# Altium PCB Sensor_Test.PcbDoc
Units mil, origin at the board's own origin, x right, y up, seen from the top; angles counter-clockwise.
Board outline 1500 x 1500 mil, 2 copper layers (Top Layer, Bottom Layer); 19 components, 60 nets, 97 pads, 28 vias.
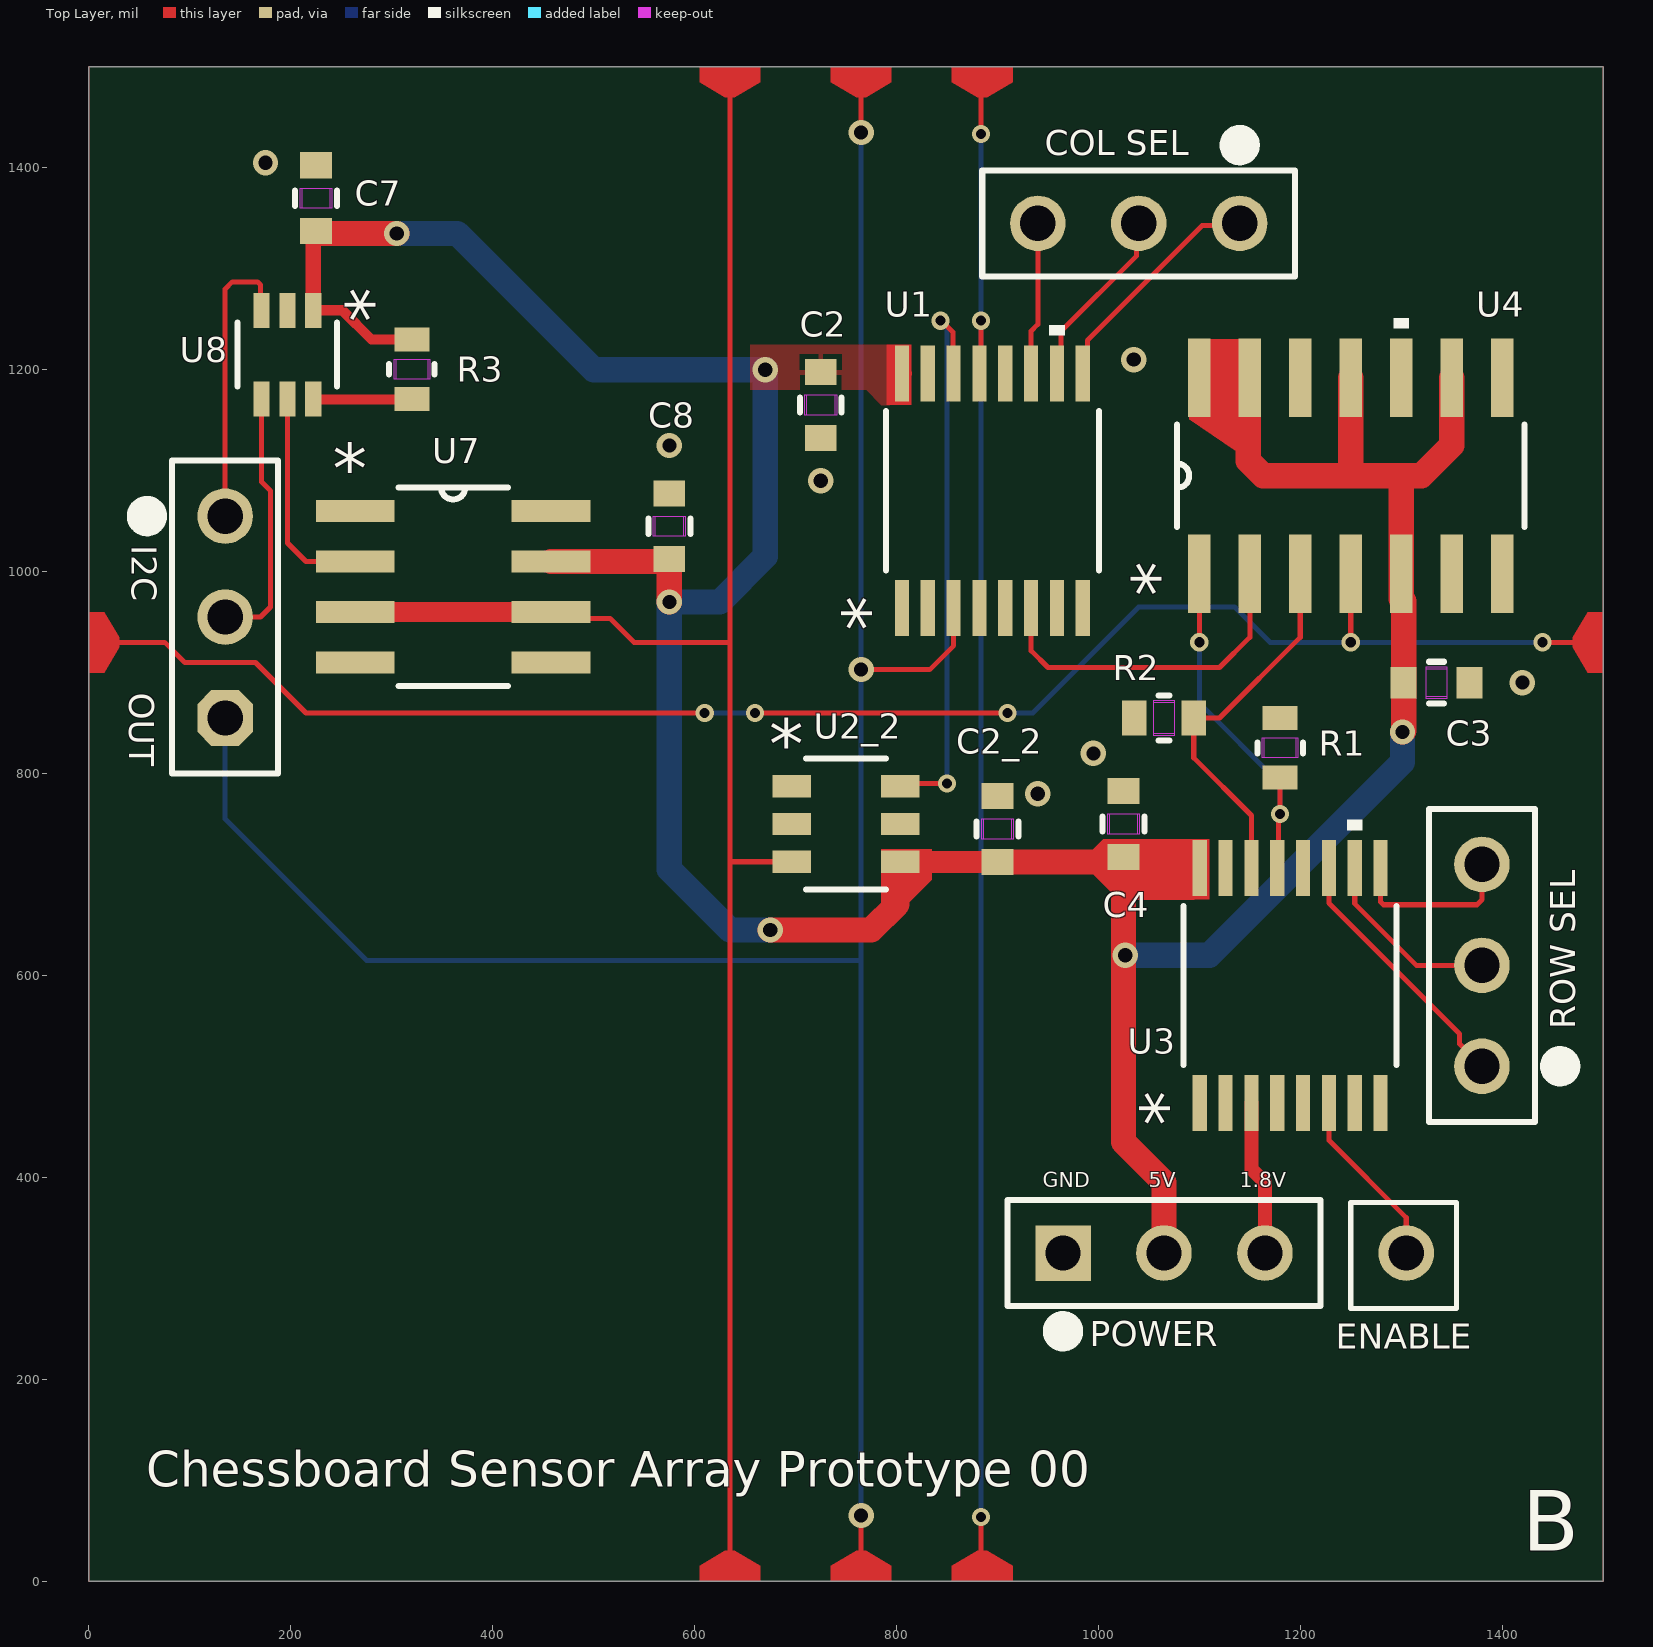
[diagram p0: Top Layer view]
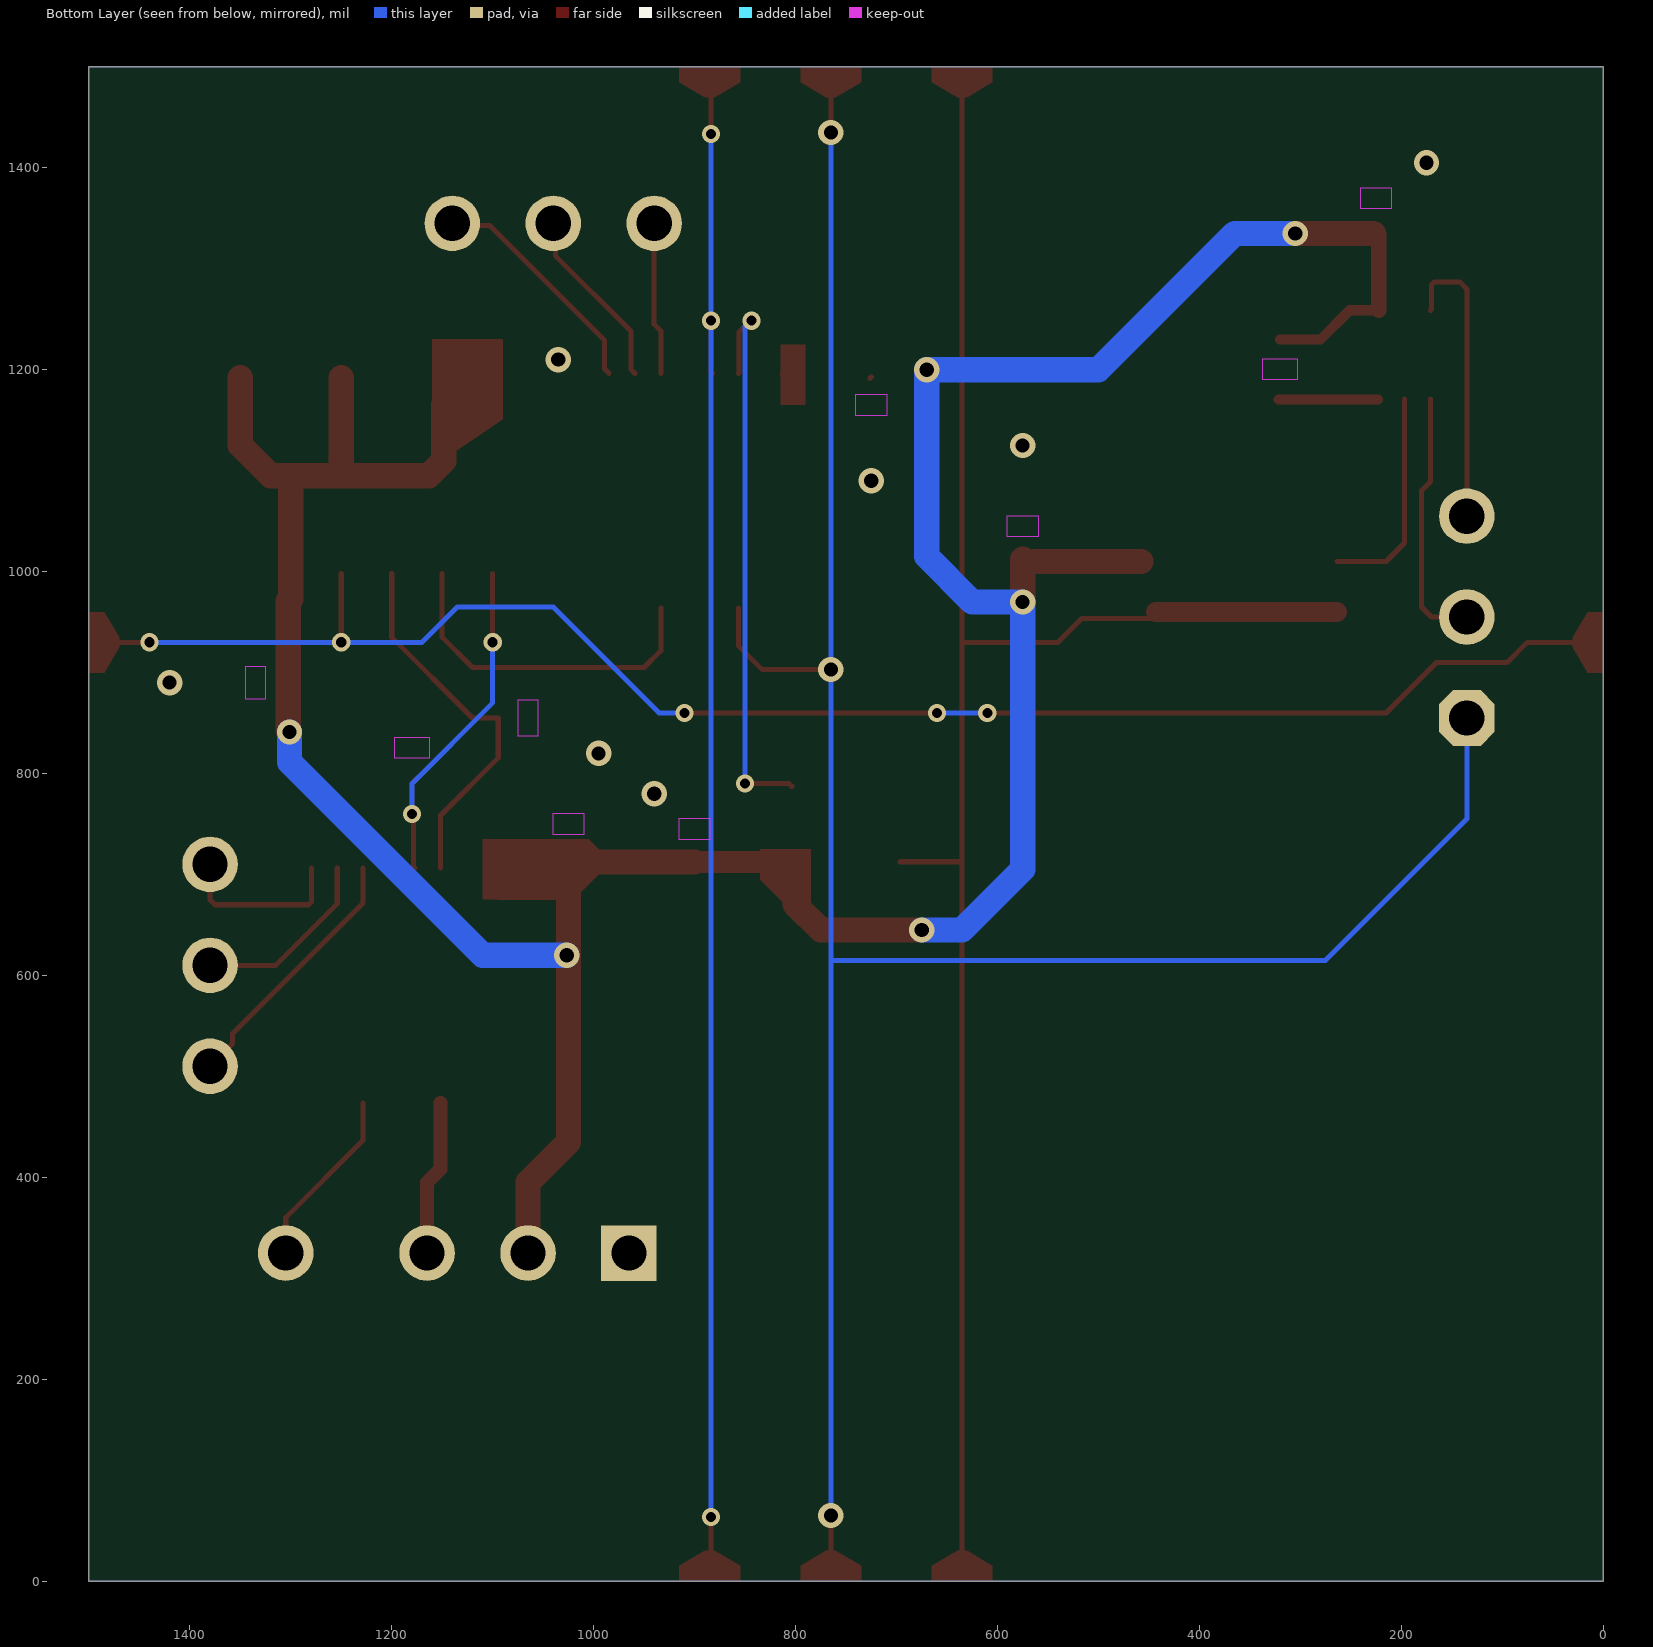
[diagram p1: Bottom Layer view, seen from below]
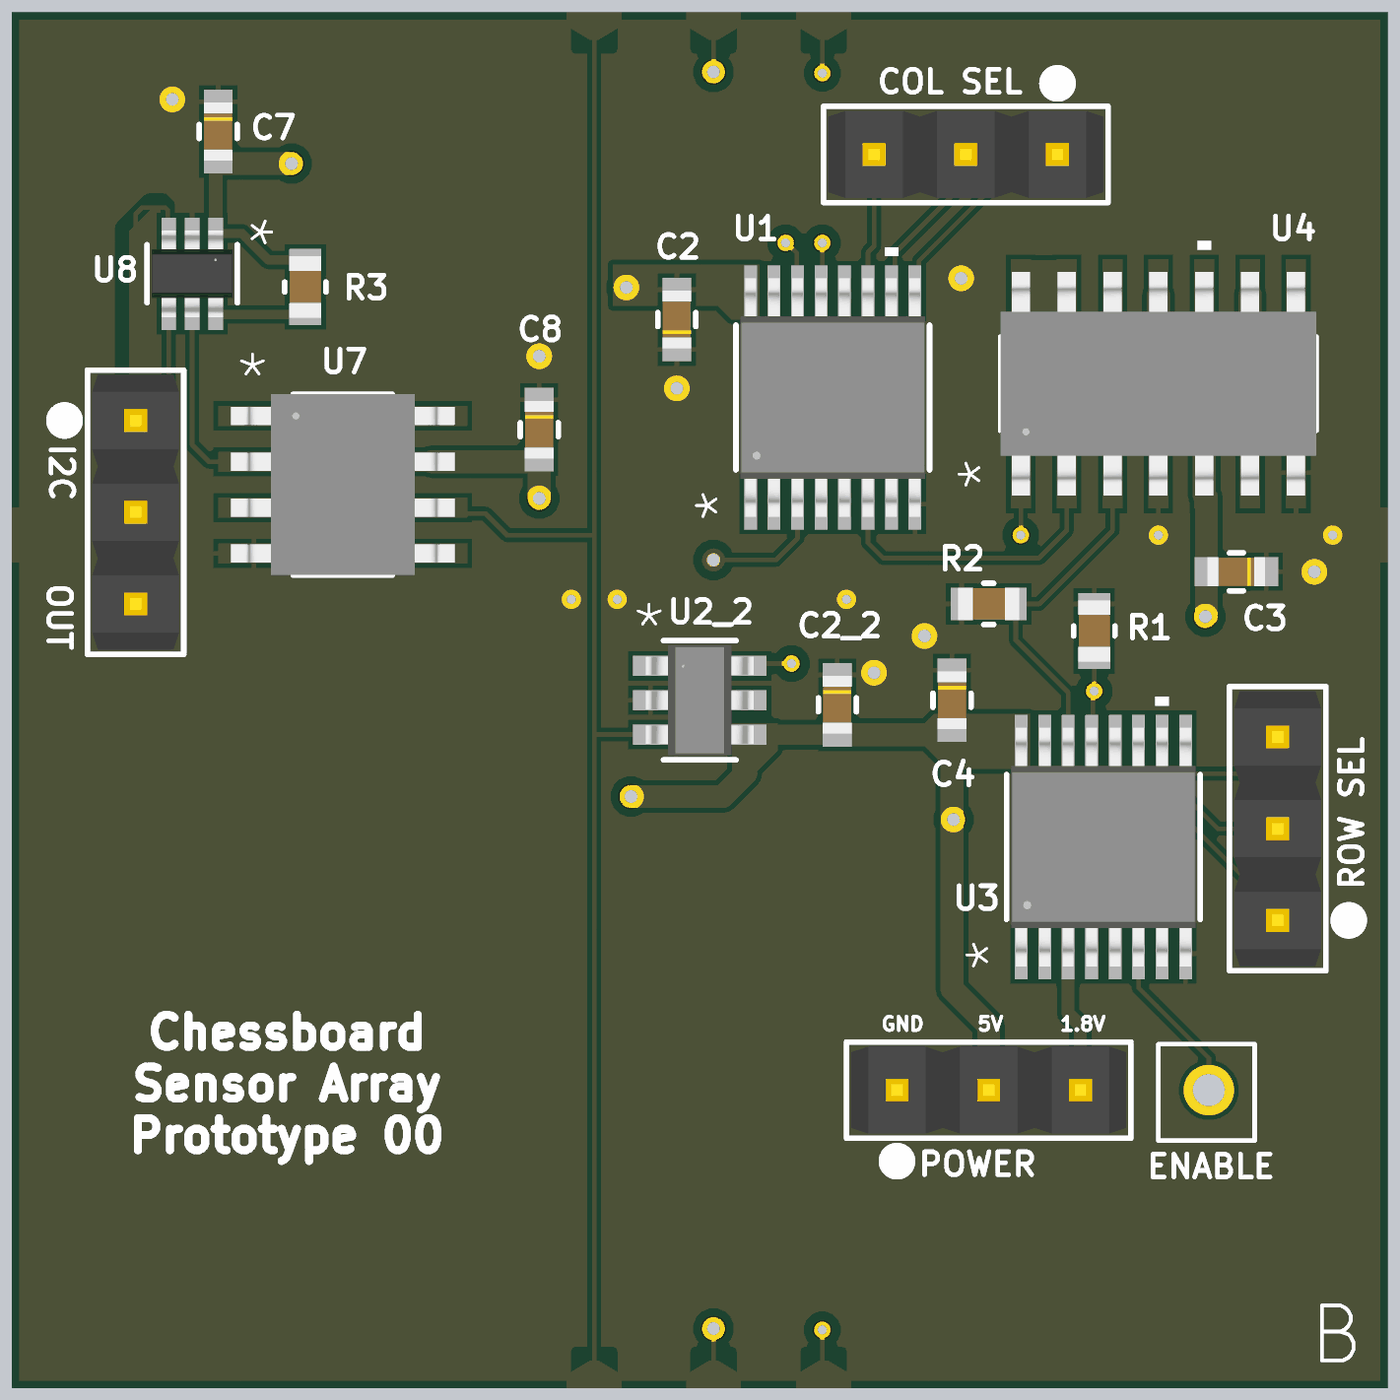
[diagram p2: 3D render of the assembled board from above, using the file's embedded part models]

## Layer stack, top to bottom
Top Solder: solder mask 0.4, Solder Resist, Dk 3.5
Top Layer: signal copper 1.4
Dielectric 1: dielectric 12.6, FR-4, Dk 4.8
Bottom Layer: signal copper 1.4
Bottom Solder: solder mask 0.4, Solder Resist, Dk 3.5

## Board outline
0,0 1500,0 1500,1500 0,1500

## Design rules (kind name [scope] priority, off if disabled: settings)
BoardOutlineClearance [All] p1: gap=7.87 ignorepadtopadclearanceinfootprint=FALSE
Clearance [All] p1: gap=5 ignorepadtopadclearanceinfootprint=TRUE except(7.87: Arc-SMDPad Track-SMDPad; 10: Arc-Via Track-Via Via-Via; 12.99: Arc-THPad Track-THPad; 15: Arc-Hole Track-Hole SMDPad-Hole THPad-Hole Via-Hole Fill-Hole Poly-Hole Region-Hole Text-Hole)
DiffPairsRouting [All] p1: maxlimit=10 minlimit=5 mostfreqgap=5 toplayer_minwidth=5 toplayer_maxwidth=1000 toplayer_prefwidth=5 bottomlayer_minwidth=5 bottomlayer_maxwidth=1000 bottomlayer_prefwidth=5 maxuncoupledlength=500
HoleSize [All] p1: absolutevalues=TRUE maxlimit=248.03 minlimit=5.91 maxpercent=80.000 minpercent=20.000
HoleToHoleClearance [All] p1: gap=9.84 allowstackedmicrovias=FALSE
MinimumAnnularRing [All] p1: minimumring=3
MinimumSolderMaskSliver [All] p1: minsoldermaskwidth=0
PlaneClearance [All] p1: clearance=5
PlaneConnect PlaneConnectPowerPads [InPadClass('PowerPads')] p1: planeconnectstyle=Direct reliefexpansion=20 reliefentries=4 reliefconductorwidth=10 reliefairgap=10
PlaneConnect [All] p2: pad.planeconnectstyle=Relief pad.reliefexpansion=11.81 pad.reliefentries=4 pad.reliefconductorwidth=5 pad.reliefairgap=5 via.planeconnectstyle=Direct via.reliefexpansion=11.81 via.reliefentries=4 via.reliefconductorwidth=5 via.reliefairgap=5
PolygonConnect PolygonConnectPowerPads [All vs (InPadClass('PowerPads'))] p1: connectstyle=Direct reliefconductorwidth=10 reliefentries=4 polygonreliefangle="90 Angle" airgapwidth=10
PolygonConnect [All] p2: thpad.connectstyle=Relief thpad.reliefconductorwidth=10 thpad.reliefentries=4 thpad.polygonreliefangle="90 Angle" thpad.airgapwidth=5 smdpad.connectstyle=Relief smdpad.reliefconductorwidth=5 smdpad.reliefentries=4 smdpad.polygonreliefangle="90 Angle" smdpad.airgapwidth=5 via.connectstyle=Direct via.reliefconductorwidth=5 via.reliefentries=4 via.polygonreliefangle="90 Angle" via.airgapwidth=5
RoomDefinition U_Hall_Latch1 [InComponentClass('U_Hall_Latch1')] p1: confinementstyle=ConfineIn formatcopy=TRUE lockcomponents=FALSE outline 980,670 655,670 655,865 980,865
RoutingVias [All] p1: holewidth=11.81 width=19.68 viastyle="Through Hole" minholewidth=5.91 minwidth=9.84 maxholewidth=50 maxwidth=50
SilkToSilkClearance [All] p1: silktosilkclearance=0
SilkToSolderMaskClearance [IsPad] p1: minsilkscreentomaskgap=5 clearancetoexposedcopper=TRUE
SolderMaskExpansion [All] p1: expansion=1.5 istentingtop=FALSE
Width [All] p1: maxlimit=1000 minlimit=5 preferedwidth=5 minimp=50.000000 maximp=50.000000 favimp=50.000000
22 further rules are at their usual default settings.

## Classes and differential pairs
net class OUT[0..3]: OUT0 OUT1 OUT2 OUT3
component class U_Hall_Latch0: x
channel class Hall_Latch: U_Hall_Latch0 U_Hall_Latch1 U_Hall_Latch2 U_Hall_Latch3
component class U_Hall_Latch1: C2_2 U2_2
component class TOP: C2 C3 C4 C7 C8 R1 R2 R3 U1 U3 U4 U7 U8

## Components (designator, comment, footprint, x,y, rotation, side; value= is the part's Value field where it differs from the comment)
C2 "1μF" CAP_CL10_SAM 725,1165 r90 top
C2_2 "1μF" CAP_CL10_SAM 900,745 r270 top (schematic designator C2)
C3 "1μF" CAP_CL10_SAM 1335,890 r180 top
C4 "1μF" CAP_CL10_SAM 1025,750 r270 top
C7 "1μF" CAP_CL10_SAM 225,1370 r270 top
C8 "1μF" CAP_CL10_SAM 575,1045 r270 top
"COL SEL" "Comment" CONN_10129378-903004BLF_AMP#1 1140,1345 r180 top
I2C "Comment" CONN_10129378-903004BLF_AMP#2 135,1055 r270 top
POWER "Comment" CONN_10129378-903004BLF_AMP#3 965,325 r0 top
R1 "10kΩ" RES_RC0603_YAG 1180,825.5 r90 top
R2 "10kΩ" RES_RC0603_YAG 1065,855 r180 top
R3 "10kΩ" RES_RC0603_YAG 320,1200.5 r90 top
"ROW SEL" "Comment" CONN_10129378-903004BLF_AMP#1 1380,510 r90 top
U1 "TMUX1308PWR" TSSOP16_PW_TEX 895,1080 r90 top
U2_2 "TMAG5328A1DQDBVR" SOT23_DBV_TEX 750,750 r0 top (schematic designator U2)
U3 "TMUX1308PWR" TSSOP16_PW_TEX 1190,590 r90 top
U4 "SN74HC14DR" D14 1250,1095 r90 top
U7 "TL081CDR" D8 360.83,985 r0 top
U8 "MCP4018T-103E/LT" SC70-6_MC_MCH 196.65,1215 r270 top

## Footprints (in the part's own frame and the unit in brackets; to place one, negate y for a bottom-side part, rotate by r counter-clockwise, add the part's x,y. Pads: shape width x height; smd on the part's side, far side on the other; paste and mask are expansions set on the pad)
CAP_CL10_SAM [mm]
  rect 0.656x0.8 smd paste+0 mask+0: 1(-0.828,0) 2(0.828,0)
  Top Layer keep-out region: -0.254,-0.349 -0.254,0.349 0.254,0.349 0.254,-0.349
  Keep-Out Layer region: -0.254,-0.4 -0.254,0.4 0.254,0.4 0.254,-0.4
  silkscreen extent -0.19,-0.53 0.19,0.53, body extent -0.8,-0.4 0.8,0.4, height 0.9
CONN_10129378-903004BLF_AMP#1 [mil]
  round 55 / inner round 60 / far side round 55 hole 35 paste-99999 mask+0: 1(0,0) 2(100,0) 3(200,0)
  silkscreen extent -55,-87 255,53, body extent -50,-47 250,47, height 418
CONN_10129378-903004BLF_AMP#2 [mil]
  round 55 / inner round 60 / far side round 55 hole 35 paste-99999 mask+0: 1(0,0) 2(100,0)
  oct 55x55 / inner round 60 / far side oct 55x55 hole 35 paste-99999 mask+0: 3(200,0)
  silkscreen extent -55,-87 255,53, body extent -50,-47 250,47, height 418
CONN_10129378-903004BLF_AMP#3 [mil]
  rect 55x55 / inner round 60 / far side rect 55x55 hole 35 paste-99999 mask+0: 1(0,0)
  round 55 / inner round 60 / far side round 55 hole 35 paste-99999 mask+0: 2(100,0)
  round 55 hole 35 paste-99999 mask+0: 3(200,0)
  silkscreen extent -55,-87 255,52, body extent -50,-47 250,47, height 418
D8 [mil]
  rect 78x22 smd paste-39 mask-39: 1(-97,75) 2(-97,25) 3(-97,-25) 4(-97,-75) 5(97,-75) 6(97,-25) 7(97,25) 8(97,75)
  silkscreen extent -54,-98 54,98, body extent -122,-99 122,99, height 69
D14 [mil]
  rect 78x22 smd paste-39 mask-39: 1(-97,150) 2(-97,100) 3(-97,50) 4(-97,0) 5(-97,-50) 6(-97,-100) 7(-97,-150) 8(97,-150) 9(97,-100) 10(97,-50) 11(97,0) 12(97,50) 13(97,100) 14(97,150)
  silkscreen extent -51,-172 156,172, body extent -122,-172 122,172, height 69
RES_RC0603_YAG [mil]
  rect 24x35 smd paste+0 mask+0: 1(-29.5,0) 2(29.5,0)
  Top Layer keep-out region: -10,-15.5 -10,15.5 10,15.5 10,-15.5
  Keep-Out Layer region: -10,-17.5 -10,17.5 10,17.5 10,-17.5
  silkscreen extent -5,-22 5,22, body extent -34,-17 34,17, height 22
SC70-6_MC_MCH [mil]
  rect 34.67x16 smd paste+0 mask+0: 1(-43.91,25.59) 2(-43.91,0) 3(-43.91,-25.59) 4(43.91,-25.59) 5(43.91,0) 6(43.91,25.59)
  silkscreen extent -32,-49 32,49, body extent -47,-44 47,44, height 43
SOT23_DBV_TEX [mil]
  rect 38.5x22 smd paste+0 mask+0: 1(-53.75,37.4) 2(-53.75,0) 3(-53.75,-37.4) 4(53.75,-37.4) 5(53.75,0) 6(53.75,37.4)
  silkscreen extent -40,-65 40,65, body extent -59,-60 59,60, height 57
TSSOP16_PW_TEX [mil]
  rect 55.5x14 smd paste+0 mask+0: 1(-116.25,89.57) 2(-116.25,63.98) 3(-116.25,38.39) 4(-116.25,12.8) 5(-116.25,-12.8) 6(-116.25,-38.39) 7(-116.25,-63.98) 8(-116.25,-89.57) 9(116.25,-89.57) 10(116.25,-63.98) 11(116.25,-38.39) 12(116.25,-12.8) 13(116.25,12.8) 14(116.25,38.39) 15(116.25,63.98) 16(116.25,89.57)
  silkscreen extent -79,-106 164,106, body extent -130,-101 130,101, height 47

## Part data
C2 C2_2 C3 C4 C7 C8: library part CL10B104KB8NNWC, "No Description Available", Mfr_Name=Samsung, Supplier Part Number 1=1276-1935-6-ND, Digi-Key_Part_Number_1=1276-1935-2-ND, Digi-Key_Part_Number_2=1276-1935-1-ND, Digi-Key_Part_Number_3=1276-1935-6-ND, Supplier 1=Digi-Key, Supplier 2=Mouser, Supplier Part Number 2=187-CL10B104KB8NNWC
R1 R2 R3: library part RC0603FR-7W10KL, "No Description Available", Mfr_Name=Yageo, Supplier Part Number 1=603-RC0603FR-7W10KL, Copyright="Copyright (C) 2023 Ultra Librarian. All rights reserved.", Manufacturer_Part_Number=RC0603FR-7W10KL, RefDes=RefDes, Supplier 1=Mouser, Supplier 2=Digi-Key, Supplier Part Number 2=13-RC0603FR-7W10KLCT-ND, Type=DEV
U1 U3: "No Description Available", Mfr_Name="Texas Instruments", Supplier Part Number 1=595-TMUX1308PWR, RefDes=RefDes, Supplier 1=Mouser, Supplier 2=Digi-Key, Supplier Part Number 2=296-TMUX1308PWRCT-ND, Type=Type
U2_2: "No Description Available", Mfr_Name="Texas Instruments", Supplier Part Number 1=296-TMAG5231A1CQDBZRCT-ND, Copyright="Copyright (C) 2023 Ultra Librarian. All rights reserved.", Manufacturer_Part_Number=TMAG5328A1DQDBVR, RefDes=RefDes, Supplier 1=Digi-Key, Type=DEV
U4: "No Description Available", Mfr_Name="Texas Instruments", Supplier Part Number 1=595-SN74HC14DR, Digi-Key_Part_Number_1=296-1194-1-ND, Digi-Key_Part_Number_2=296-1194-2-ND, Digi-Key_Part_Number_3=296-1194-6-ND, Digi-Key_Part_Number_4=2156-SN74HC14DR-ND, RefDes=RefDes, Supplier 1=Mouser, Supplier 2=Digi-Key, Supplier Part Number 2=296-1194-1-ND, Type=Type
U7: "No Description Available", Mfr_Name="Texas Instruments", Supplier Part Number 1=595-TL081CDR, Copyright="Copyright (C) 2023 Ultra Librarian. All rights reserved.", Manufacturer_Part_Number=TL081CDR, RefDes=RefDes, Supplier 1=Mouser, Supplier 2=Digi-Key, Supplier Part Number 2=296-15001-1-ND, Type=DEV
U8: library part MCP4018T-103ELT, "No Description Available", Mfr_Name=Microchip, Supplier Part Number 1=579-MCP4018T103E/LT, Copyright="Copyright (C) 2023 Ultra Librarian. All rights reserved.", Manufacturer_Part_Number=MCP4018T-103E/LT, RefDes=RefDes, Supplier 1=Mouser, Supplier 2=Digi-Key, Supplier Part Number 2=MCP4018T-103E/LTCT-ND, Type=DEV

## Free pads (board coordinates)
  round 55 hole 35 mask+0: 4(1305,325)

## Via types
v1: diameter 25, hole 14, Top Layer to Bottom Layer, 16 vias
v2: diameter 18, hole 10, Top Layer to Bottom Layer, 12 vias

## Nets (pads, with @x,y where several pads share a name; then routed paths per layer and width w, separated by ;. In a path a pad name is that pad's centre, name@x,y a point inside that pad or via, vN(x,y) a via of type N, cw(c..) or ccw(c..) an arc to the next point about the centre after c; other vN are vias at no path point)
+1.8: POWER.3 U3.3 | length 154.3
  Top Layer w14: U3.3 1151.61,408.39 1165,395 POWER.3
+5: C2.2 C2_2.2 C3.2 C4.2 C7.2 C8.2 POWER.2 R3.2 U1.16 U2_2.4 U3.16 U4.5 U4.9 U4.11 U4.13 U4.14 U7.7 U8.1 | length 3368.6
  Top Layer w5: C8.2@562.21,1008.8 563.42,1010 C8.2@564.62,1011.2 ; C2.2@725,1192.59 C2.2@726.34,1191.25 ; U3.16@1099.09,707.59 U3.16
  Top Layer w10: U8.1 251.09,1258.91 280,1230 R3.2
  Top Layer w15: U8.1 222.24,1334.65 C7.2
  Top Layer w20: U1.16@802.8,1193.62 U1.16
  Top Layer w22: U2_2.4 C2_2.2
  Top Layer w25: C7.2@227.41,1335 v1(305,1335) ; U7.7 C8.2@563.42,1010 ; v1(575,970) C8.2 ; v1(675,645) 775,645 800.39,670.39 ; C2_2.2 1025,712.41 1025,435 1065,395 POWER.2 ; U4.13@1148.5,1165.5 1148.5,1109.64 1163.14,1095 1250,1095 ; U4.11 1250,1095 ; v1(1301.2,841.2) 1302.41,842.41 C3.2 1302.41,970.59 1300,973 U4.5 1300,1095 ; U4.9 1350,1125 1320,1095 1300,1095 ; 1250,1095 1300,1095
  Bottom Layer w25: v1@311.71,1335 365,1335 500,1200 v1(670,1200) 670,1015 625,970 v1(575,970) 575,705 635,645 v1(675,645) ; v1(1026.62,620) 1110,620 1301.2,811.2 v1(1301.2,841.2)
GND: C2.1 C2_2.1 C3.1 C4.1 C7.1 C8.1 POWER.1 R1.2 R2.2 U1.8 U2_2.2 U3.8 U4.7 U7.4 U8.2
  other v1: 940,780 995,820 1420,890 725,1090 575,1125 1035,1210 175,1405
NetR1_1: R1.1 U3.13 U4.1 | length 363.6
  Top Layer w5: v2(1100,930) U4.1 ; R1.1@1175,795.5 1180,790.5 v2(1180,760) 1178.6,758.6 1178.6,707.65 U3.13
  Bottom Layer w5: v2(1100,930) 1100,870 1180,790 v2(1180,760)
NetR2_1: R2.1 U3.14 U4.3 | length 374
  Top Layer w5: U3.14 1151.61,758.39 1094.5,815.5 R2.1 1120,855 1200,935 U4.3
NetR3_1: R3.1 U8.6 | length 99.7
  Top Layer w5: U8.6 U8.6@222.83,1170.5
  Top Layer w10: U8.6@222.83,1170.5 R3.1@321.65,1170.5
NetU1_1: U1.1
NetU1_2: U1.2
NetU1_3: I2C.3 U1.3 | length 2381.6
  Top Layer w5: 765,25 v1(765,65) ; v1(765,902.93) 832.93,902.93 856.61,926.61 U1.3 ; v1(765,1435) 765,1480
  Bottom Layer w5: I2C.3 135,755 275,615 765,615 ; v1(765,65) 765,615 ; v1(765,1435) v1(765,902.93) 765,615
NetU1_4: U1.4
NetU1_5: U1.5
NetU1_6: U1.6 U4.2 | length 341.1
  Top Layer w5: U1.6 933.39,921.61 950,905 1120,905 1150,935 U4.2
NetU1_7: U1.7
NetU1_9: "COL SEL.1" U1.9 | length 233.6
  Top Layer w5: U1.9 989.07,1200.75 989.07,1229.07 1102.93,1342.93 1137.93,1342.93 1140,1345
NetU1_10: "COL SEL.2" U1.10 | length 217.3
  Top Layer w5: U1.10 962.79,1200.07 962.79,1237.79 1037.93,1312.93 1037.93,1342.93 1040,1345 ; 1025,1355 1060,1355
NetU1_11: "COL SEL.3" U1.11 | length 151.5
  Top Layer w5: U1.11 933.39,1238.39 940,1245 940,1345
NetU1_12: U1.12
NetU1_15: U1.15
NetU2_1_1: 
NetU2_1_5: 
NetU2_2_1: U2_2.1
NetU2_2_5: U2_2.5
NetU2_3_1: 
NetU2_3_5: 
NetU2_4_1: 
NetU2_4_5: 
NetU3_1: U3.1
NetU3_2: U3.2
NetU3_4: U3.4
NetU3_5: U3.5
NetU3_6: pad.4 U3.6 | length 180.5
  Top Layer w5: U3.6 1228.39,436.61 1305,360 pad.4
NetU3_7: U3.7
NetU3_9: "ROW SEL.3" U3.9 | length 172
  Top Layer w5: U3.9 1279.57,672.93 1282.5,670 1375,670 1380,675 1380,710
NetU3_10: "ROW SEL.2" U3.10 | length 186.5
  Top Layer w5: U3.10 1253.98,671.02 1315,610 1380,610
NetU3_11: "ROW SEL.1" U3.11 | length 259.1
  Top Layer w5: U3.11 1228.39,671.61 1357.93,542.07 1357.93,532.07 1380,510
NetU3_12: U3.12
NetU3_15: U3.15
NetU4_4: U4.4 | length 1620
  Top Layer w5: 20,930 75,930 95,910 165,910 215,860 v2(610,860) ; v2(660,860) v2(910,860) ; v2(1250,930) U4.4 ; v2(1440,930) 1485,930
  Bottom Layer w5: v2(610,860) v2(660,860) ; v2(910,860) 935,860 1040,965 1135,965 1170,930 v2(1250,930) v2(1440,930)
NetU4_6: U4.6
NetU4_8: U4.8
NetU4_10: U4.10
NetU4_12: U4.12
NetU5_1: 
NetU5_2: 
NetU5_4: 
NetU5_5: 
NetU5_7: 
NetU5_12: 
NetU5_15: 
NetU7_1: U7.1
NetU7_2: U7.2 U8.5 | length 217.5
  Top Layer w5: U8.5 196.65,1028.35 215,1010 U7.2
NetU7_3: U2_2.3 U7.3 U7.6 | length 1904.7
  Top Layer w5: U7.6@442.83,960 449.22,953.6 516.4,953.6 540,930 634.95,930 ; 634.95,20.05 634.95,712.6 ; 634.95,1479.95 634.95,930 ; U2_2.3 634.95,712.6 ; 634.95,712.6 634.95,930
  Top Layer w20: U7.3 U7.6@442.83,960
NetU7_5: U7.5
NetU7_8: U7.8
NetU8_3: I2C.1 U8.3 | length 289.8
  Top Layer w5: I2C.1 135,1280 142.07,1287.07 167.07,1287.07 170,1284.14 170,1259.97 U8.3
NetU8_4: I2C.2 U8.4 | length 258.9
  Top Layer w5: I2C.2 170,955 180,965 180,1080 171.06,1088.94 U8.4
OUT0: U1.13 | length 1509.9
  Top Layer w5: U1.13 883.6,1197.65 v2(883.6,1248.6) ; 882.2,1477.8 883.6,1476.4 v2(883.6,1433.6) ; 883.6,21.4 v2(883.6,63.6)
  Bottom Layer w5: v2(883.6,63.6) v2(883.6,1248.6) v2(883.6,1433.6)
OUT1: U1.14 U2_2.6 | length 560.2
  Top Layer w5: U2_2.6 806.35,790 v2(850,790) ; v2@845,1248.28 855.81,1237.47 855.81,1197.06 U1.14
  Bottom Layer w5: v2@848.08,1245.2 850,1243.28 v2(850,790)
  other v2: 843.6,1248.6
OUT2: 
OUT3: 

## Polygon pours and split planes (outlines as drawn)
GND on Top Layer "NONET_L01_P003" (solid, remove dead copper, shelved, pour order 3): 0,1500 0,0 1500,0 1500,1500
+5 on Top Layer "+5_L01_P002" (solid, remove dead copper, pour order 2): 795,1225 655,1225 655,1180 770,1180 785,1165 795,1165
GND on Bottom Layer "NONET_L02_P006" (solid, shelved, pour order 6): 0,1500 0,0 1500,0 1500,1500

## Other copper
Top Layer:
  rectangle net +5: 790,1165 815,1225
  rectangle net +5: 1085,675 1110,735
  region net NetU7_3: 630,30 605,15 605,0 665,0 665,15 640,30
  region net NetU1_3: 760,30 735,15 735,0 795,0 795,15 770,30
  region net OUT0: 880,30 855,15 855,0 915,0 915,15 890,30
  region net NetU4_4: 1470,925 1485,900 1500,900 1500,960 1485,960 1470,935
  region net OUT0: 890,1470 915,1485 915,1500 855,1500 855,1485 880,1470
  region net NetU1_3: 770,1470 795,1485 795,1500 735,1500 735,1485 760,1470
  region net NetU7_3: 640,1470 665,1485 665,1500 605,1500 605,1485 630,1470
  region net NetU4_4: 30,935 15,960 0,960 0,900 15,900 30,925
  region net +5: 785,725 785,670 810,670 835,695 835,725
  region net +5: 1090,1230 1160,1230 1160,1120 1135,1120 1090,1150.91
  region net +5: 995,725 1005,735 1095,735 1095,675 1065,675 1020,675 995,700

## Silkscreen, mask and mechanical layers (free items; w line width, h text height)
Top Overlay:
  lines w5: 1250,270 1355,270 1355,375 1250,375 1250,270
  text "OUT" at 40,880 h25 r270
  text "GND" at 945,390 h15
  text "5V" at 1050,390 h15
  text "1.8V" at 1140,390 h15
  text "ENABLE" at 1235,230 h25
  text "Chessboard Sensor Array Prototype 00" at 56.74,93.67 h35
  text "B" at 1420.01,30.01 h60

## Text inside footprints (layer, text, board x,y; h text height)
U1: Top Overlay "*" at 796.43,941.25 h50 r90; Mechanical 13 "*" at 847.5,994 h50 r90
U2_2: Top Overlay "*" at 673.75,804.4 h50; Mechanical 13 "*" at 718,757 h50
U3: Top Overlay "*" at 1091.43,451.25 h50 r90; Mechanical 13 "*" at 1142.5,504 h50 r90
U4: Top Overlay "*" at 1083,975.5 h50 r90; Mechanical 13 "*" at 1083,975.5 h50 r90
U7: Top Overlay "*" at 241.33,1077 h50; Mechanical 13 "*" at 241.33,1077 h50
U8: Top Overlay "*" at 233.24,1281.41 h50 r270; Mechanical 13 "*" at 195.24,1244.07 h50 r270